# Altium PCB 4Layer.PcbDoc
Units mm, origin at the board's own origin, x right, y up, seen from the top; angles counter-clockwise.
Board outline 152.4 x 101.6 mm, 4 copper layers (Top Layer, Int1 (GND), Int2 (PWR), Bottom Layer), stack 1.57 mm thick; 68 components, 45 nets, 268 pads, 0 vias.
Unrouted connection lines stored in the file: 183.
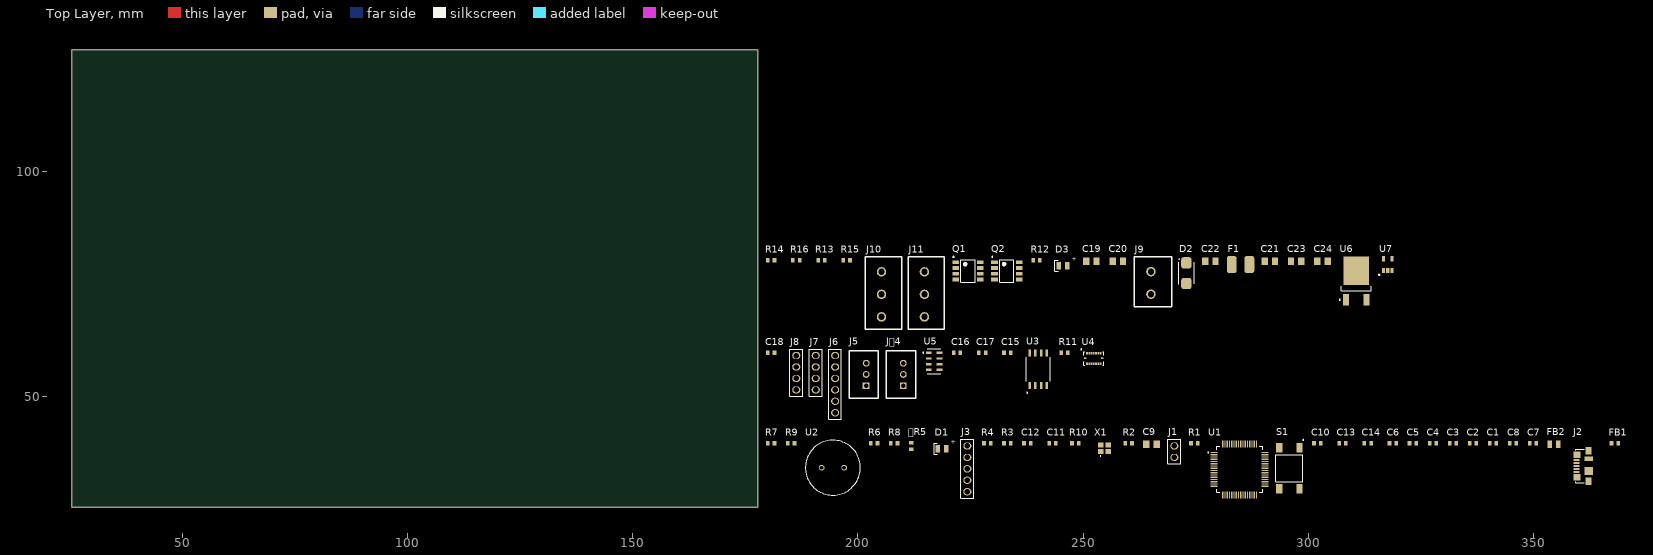
[diagram p0: Top Layer view]
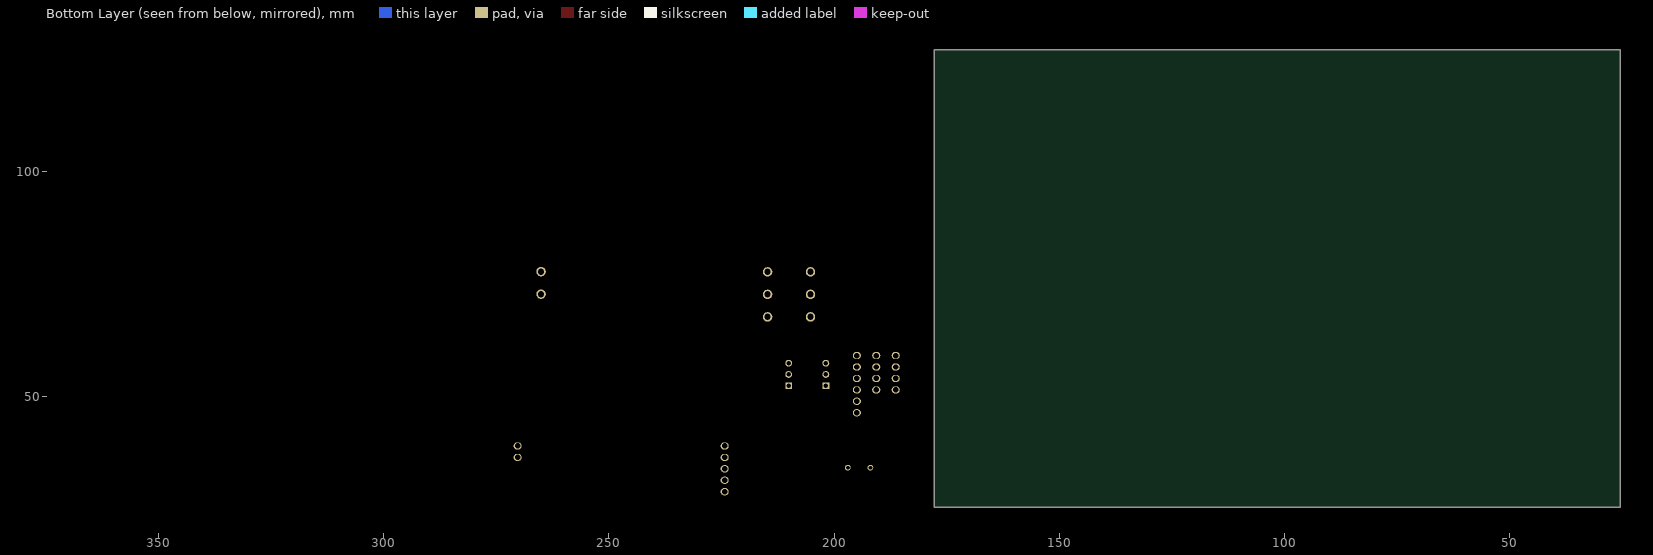
[diagram p1: Bottom Layer view, seen from below]

## Layer stack, top to bottom
Top Solder: solder mask 0.0254, SM-001, Dk 4
Top Layer: signal copper 0.035
Dielectric 1: prepreg 0.2, PP-017, Dk 4.6
Int1 (GND): signal copper 0.0175
Dielectric 3: core 1.065, Core-039, Dk 4.6
Int2 (PWR): signal copper 0.0175
Dielectric 5: prepreg 0.2, PP-017, Dk 4.6
Bottom Layer: signal copper 0.035
Bottom Solder: solder mask 0.0254, SM-001, Dk 4

## Board outline
25.4,25.4 177.8,25.4 177.8,127 25.4,127

## Design rules (kind name [scope] priority, off if disabled: settings)
Clearance [All] p1: gap=0.254 ignorepadtopadclearanceinfootprint=FALSE except(0.1: SMDPad-SMDPad; 0.2: Arc-Arc Arc-Track Arc-SMDPad Arc-Hole Track-Track Track-SMDPad Track-Hole SMDPad-THPad SMDPad-Hole THPad-Hole Via-Hole Fill-Hole Poly-Hole Region-Hole Text-Hole; 0.3: Arc-Via Track-Via Via-Via; 0.33: Arc-THPad Track-THPad; 0.5: THPad-THPad)
DiffPairsRouting [All] p1: maxlimit=0.254 minlimit=0.203 mostfreqgap=0.254 toplayer_maxgap=0.203 toplayer_prefgap=0.203 toplayer_minwidth=0.26 toplayer_maxwidth=0.26 toplayer_prefwidth=0.26 midlayer1_minwidth=0.381 midlayer1_maxwidth=0.381 midlayer1_prefwidth=0.381 midlayer2_minwidth=0.381 midlayer2_maxwidth=0.381 midlayer2_prefwidth=0.381 bottomlayer_maxgap=0.203 bottomlayer_prefgap=0.203 bottomlayer_minwidth=0.26 bottomlayer_maxwidth=0.26 bottomlayer_prefwidth=0.26 maxuncoupledlength=12.7
HoleSize [All] p1: absolutevalues=TRUE maxlimit=6 minlimit=0.3 maxpercent=80.000 minpercent=20.000
HoleToHoleClearance [All] p1: gap=0.5 allowstackedmicrovias=TRUE
MinimumSolderMaskSliver [All] p1: minsoldermaskwidth=0.005
PlaneConnect [All] p1: planeconnectstyle=Direct reliefexpansion=0.508 reliefentries=4 reliefconductorwidth=0.254 reliefairgap=0.254
PolygonConnect [All] p1: connectstyle=Direct reliefconductorwidth=0.254 reliefentries=4 polygonreliefangle="90 Angle" airgapwidth=0.254
RoomDefinition Power [InComponentClass('Power')] p1: confinementstyle=ConfineIn formatcopy=TRUE lockcomponents=FALSE outline 178.943,64.516 319.278,64.516 319.278,83.947 178.943,83.947
RoomDefinition Peripheral [InComponentClass('Peripheral')] p2: confinementstyle=ConfineIn formatcopy=TRUE lockcomponents=FALSE outline 178.943,44.577 255.016,44.577 255.016,63.373 178.943,63.373
RoomDefinition MCU [InComponentClass('MCU')] p3: confinementstyle=ConfineIn formatcopy=TRUE lockcomponents=FALSE outline 178.943,26.797 370.713,26.797 370.713,43.307 178.943,43.307
RoutingVias [All] p1: holewidth=0.3 width=0.7 viastyle="Through Hole" minholewidth=0.3 minwidth=0.5 maxholewidth=0.7 maxwidth=0.9
SilkToSilkClearance [All] p1: silktosilkclearance=0.2
SolderMaskExpansion [All] p1: expansion=0.05 istentingtop=FALSE
UnRoutedNet [All] p1: checkbadconnections=TRUE
Width [All] p1: maxlimit=1 minlimit=0.2 preferedwidth=0.3 minimp=50.000000 maximp=50.000000 favimp=50.000000
23 further rules are at their usual default settings.

## Classes and differential pairs
differential pair class DIFF_USB: USB_D
component class Power: C19 C20 C21 C22 C23 C24 D2 D3 F1 J9 J10 J11 Q1 Q2 R12 R13 R14 R15 R16 U6 U7
component class Peripheral: C15 C16 C17 C18 J5 J6 J7 J8 J4 R11 U3 U4 U5
component class MCU: R5 C1 C2 C3 C4 C5 C6 C7 C8 C9 C10 C11 C12 C13 C14 D1 FB1 FB2 J1 J2 J3 R1 R2 R3 R4 R6 R7 R8 R9 R10 S1 U1 U2 X1
differential pair USB_D: +USB_D_P -USB_D_N

## Components (designator, comment, footprint, x,y, rotation, side; value= is the part's Value field where it differs from the comment)
R5 "1K" "RES 0603" 211.836,38.989 r90 top
C1 "100n" "CAP 0603" 340.995,39.624 r0 top
C2 "100n" "CAP 0603" 336.55,39.624 r0 top
C3 "100n" "CAP 0603" 332.105,39.624 r0 top
C4 "100n" "CAP 0603" 327.66,39.624 r0 top
C5 "1u" "CAP 0603" 323.215,39.624 r0 top
C6 "2u2" "CAP 0603" 318.77,39.624 r0 top
C7 "100n" "CAP 0603" 349.885,39.624 r0 top
C8 "1u" "CAP 0603" 345.44,39.624 r0 top
C9 "4u7" "CAP 0805" 265.176,39.37 r0 top
C10 "100n" "CAP 0603" 302.006,39.624 r0 top
C11 "8p" "CAP 0603" 243.205,39.624 r0 top
C12 "8p" "CAP 0603" 237.617,39.624 r0 top
C13 "2u2" "CAP 0603" 307.594,39.624 r0 top
C14 "2u2" "CAP 0603" 313.182,39.624 r0 top
C15 "100n" "CAP 0603" 233.172,59.69 r0 top
C16 "100n" "CAP 0603" 221.996,59.69 r0 top
C17 "100n" "CAP 0603" 227.584,59.69 r0 top
C18 "100n" "CAP 0603" 180.721,59.69 r0 top
C19 "0u33" "CAP 0805" 251.841,80.01 r0 top
C20 "100n" "CAP 0805" 257.683,80.01 r0 top
C21 "100n" "CAP 0805" 291.465,80.01 r0 top
C22 "470p" "CAP 0805" 278.257,80.01 r0 top
C23 "4u7" "CAP 0805" 297.307,80.01 r0 top
C24 "100n" "CAP 0805" 303.149,80.01 r0 top
D1 "LED 0805 BLUE" "LED 0805 BLUE" 218.694,38.354 r0 top
D2 "SMBJ12CA-13-F" SMBJ12CA-13-F 272.923,77.343 r90 top
D3 "LED 0805 RED" "LED 0805 RED" 245.491,78.994 r0 top
F1 "0ZCG0075FF2C" 0ZCG0075FF2C 284.988,79.375 r0 top
FB1 "600 Ω @ 100 MHz" "FB 0603" 368.046,39.624 r0 top
FB2 "100R" "FB 0805" 354.584,39.37 r0 top
J1 "1x2 HEADER" "1x2 HEADER" 270.256,38.989 r90 top
J2 "47346-0001" MOLEX_47346-0001 362.204,34.544 r90 top
J3 "1x5 HEADER MALE" "1X5 HEADER MALE" 224.282,33.909 r90 top
J5 "JST B3B-XH-A" JST_B3B-XH-A 201.295,54.864 r90 top
J6 "1x6 HEADER MALE" "1X6 HEADER MALE" 194.945,52.705 r90 top
J7 "1x4 HEADER MALE" "1X4 HEADER MALE" 190.627,55.245 r90 top
J8 "1x4 HEADER MALE" "1X4 HEADER MALE" 186.309,55.245 r90 top
J9 "KF301 2P Terminal" "KF301 2P" 265.049,75.184 r90 top
J10 "KF301 3P Terminal" "KF301 3P" 205.232,72.644 r90 top
J11 "KF301 3P Terminal" "KF301 3P" 214.757,72.644 r90 top
J4 "JST B3B-XH-A" JST_B3B-XH-A 209.55,54.864 r90 top
Q1 "DMG4822SSD-13" DMG4822SSD-13 224.409,77.851 r0 top
Q2 "DMG4822SSD-13" DMG4822SSD-13 233.045,77.851 r0 top
R1 "10K" "RES 0603" 274.701,39.624 r0 top
R2 "0R" "RES 0603" 260.096,39.624 r0 top
R3 "1K" "RES 0603" 233.172,39.624 r0 top
R4 "1K" "RES 0603" 228.727,39.624 r0 top
R6 "10K" "RES 0603" 203.581,39.624 r0 top
R7 "10K" "RES 0603" 180.721,39.624 r0 top
R8 "10K" "RES 0603" 208.026,39.624 r0 top
R9 "10K" "RES 0603" 185.166,39.624 r0 top
R10 "10K" "RES 0603" 248.285,39.624 r0 top
R11 "10K" "RES 0603" 245.872,59.69 r0 top
R12 "1K" "RES 0603" 239.649,80.264 r0 top
R13 "1K" "RES 0603" 191.897,80.264 r0 top
R14 "10K" "RES 0603" 180.721,80.264 r0 top
R15 "1K" "RES 0603" 197.485,80.264 r0 top
R16 "10K" "RES 0603" 186.309,80.264 r0 top
S1 "FSM4JSMATR" FSM4JSMATR 295.783,34.036 r0 top
U1 "STM32F446RET6" STM32F446RET6 284.734,33.782 r0 top
U2 "PS1240P02BT" PS1240P02BT 194.437,34.163 r0 top
U3 "W25Q64JVSSIQ" W25Q64JVSSIQ 240.03,56.007 r90 top
U4 "BMI088" BMI088 252.349,58.42 r0 top
U5 "MS560702BA03-50" MS5607-02BA3 216.916,57.785 r0 top
U6 "L78M05CDT-TR" L78M05CDT-TR 310.642,75.565 r90 top
U7 "MIC5205-3.3YM5-TR" MIC5205-3.3YM5-TR 317.627,79.248 r0 top
X1 "FA-20H 16.0000MF10Z-AJ0" "FA-20H 16.0000MF10Z-AJ0" 254.762,38.481 r0 top

## Footprints (in the part's own frame and the unit in brackets; to place one, negate y for a bottom-side part, rotate by r counter-clockwise, add the part's x,y. Pads: shape width x height; smd on the part's side, far side on the other; paste and mask are expansions set on the pad)
0ZCG0075FF2C [mm] "PTC"
  rrect50% 2.2x3.8 smd: 1(-2,-0.125) 2(1.9,-0.125)
  body extent -2.26,-1.75 2.29,1.49, height 0.7
"1x2 HEADER" [mm]
  oval 1.6x1.8 hole 1.2: 1(-2.54,0) 2(0,0)
  silkscreen extent -3.97,-1.4 1.5,1.45
"1X4 HEADER MALE" [mm]
  oval 1.6x1.8 hole 1.2: 1(-3.81,0) 2(-1.27,0) 3(1.27,0) 4(3.81,0)
  silkscreen extent -5.23,-1.4 5.25,1.45, body extent -5.08,-1.27 5.08,1.27, height 9.2
"1X5 HEADER MALE" [mm]
  oval 1.6x1.8 hole 1.2: 1(-5.08,0) 2(-2.54,0) 3(0,0) 4(2.54,0) 5(5.08,0)
  silkscreen extent -6.5,-1.4 6.57,1.45, body extent -6.32,-1.27 6.38,1.27, height 9.2
"1X6 HEADER MALE" [mm]
  oval 1.6x1.8 hole 1.2: 1(-6.35,0) 2(-3.81,0) 3(-1.27,0) 4(1.27,0) 5(3.81,0) 6(6.35,0)
  silkscreen extent -7.77,-1.4 7.8,1.45, body extent -7.62,-1.27 7.62,1.27, height 9.2
BMI088 [mm]
  rect 0.35x0.59 smd: 1(-1.5,1.165) 2(-1,1.165) 3(-0.5,1.165) 4(0,1.165) 5(0.5,1.165) 6(1,1.165) 7(1.5,1.165) 9(1.5,-1.165) 10(1,-1.165) 11(0.5,-1.165) 12(0,-1.165) 13(-0.5,-1.165) 14(-1,-1.165) 15(-1.5,-1.165)
  rect 0.59x0.35 smd: 8(1.915,0) 16(-1.915,0)
  silkscreen extent -2.85,-1.5 2.25,2.1, body extent -2.25,-1.5 2.25,1.5, height 1.55
"CAP 0603" [mm]
  rect 0.8x1 smd: 1(-0.75,0) 2(0.75,0)
  body extent -0.8,-0.4 0.8,0.4, height 0.51
"CAP 0805" [mm]
  rect 1.4x1.7 smd: 1(-1.143,0) 2(1.143,0)
  body extent -1.15,-0.76 1.15,0.79, height 1.01
DMG4822SSD-13 [mm]
  rect 1.45x0.8 smd: 1(-2.725,1.905) 2(-2.725,0.635) 3(-2.725,-0.635) 4(-2.725,-1.905) 5(2.725,-1.905) 6(2.725,-0.635) 7(2.725,0.635) 8(2.725,1.905)
  silkscreen extent -3.32,-2.5 1.6,3.22, body extent -3.1,-2.5 3.1,2.5, height 1.7
"FA-20H 16.0000MF10Z-AJ0" [mm]
  rect 1.2x1.1 smd: 1(-0.85,-0.7) 2(0.85,-0.7) 3(0.85,0.7) 4(-0.85,0.7)
  silkscreen extent -0.95,-1.8 -0.85,-1.7, body extent -1.25,-1 1.25,1, height 0.63
"FB 0603" [mm]
  rect 0.8x1 smd: 1(-0.75,0) 2(0.75,0)
  body extent -0.8,-0.4 0.8,0.4, height 0.81
"FB 0805" [mm]
  rect 1x1.7 smd: 1(-0.95,0) 2(0.95,0)
  body extent -1,-0.63 1,0.63, height 0.86
FSM4JSMATR [mm]
  rect 1.4x2.1 smd: 1(2.25,4.55) 2(2.25,-4.55) 3(-2.25,4.55) 4(-2.25,-4.55)
  silkscreen extent -3,-3 3.18,6.39, body extent -3,-5 3,5, height 5.13
JST_B3B-XH-A [mm]
  rect 1.508x1.508 / inner round 1.508 / far side rect 1.508x1.508 hole 1: 1(-2.5,-0.525)
  round 1.508 hole 1: 2(0,-0.525) 3(2.5,-0.525)
  silkscreen extent -5.25,-3.25 5.25,3.25, body extent -4.95,-2.88 4.95,2.88, height 7
"KF301 2P" [mm] "2 Pin 5mm Terminal"
  round 2.1 hole 1.4: 1(-2.5,0) 2(2.5,0)
  silkscreen extent -5.33,-4.57 5.84,3.68, body extent -5,-4.13 5.5,3.37, height 10
"KF301 3P" [mm] "3 Pin 5mm Terminal"
  round 2.1 hole 1.4: 1(-5,0) 2(0,0) 3(5,0)
  silkscreen extent -7.75,-4.45 8.38,3.56, body extent -7.45,-4.19 7.95,3.31, height 10.01
L78M05CDT-TR [mm]
  rect 2.6x1.3 smd: 1(-4.15,2.28) 3(-4.15,-2.28)
  rect 6.3x5.7 smd: 2(2.35,0)
  silkscreen extent -4.22,-3.3 -1.15,3.82, body extent -4.89,-3.25 5.04,3.29, height 2.34
"LED 0805 BLUE" [mm]
  rect 1x1.7 smd: A(0.95,0) K(-0.95,0)
  silkscreen extent -1.8,-1.2 -1.05,1.2, body extent -1,-0.63 1,0.63, height 1.12
"LED 0805 RED" [mm]
  rect 1x1.7 smd: A(0.95,0) K(-0.95,0)
  silkscreen extent -1.8,-1.2 -1.05,1.2, body extent -1,-0.63 1,0.63, height 1.12
MIC5205-3.3YM5-TR [mm]
  rect 0.69x1.2 smd: 1(-0.95,-1.3) 2(0,-1.3) 3(0.95,-1.3) 4(0.95,1.3) 5(-0.95,1.3)
  silkscreen extent -2,-2.39 -1.81,-2.19, body extent -1.45,-1.4 1.45,1.4, height 1.45
MOLEX_47346-0001 [mm]
  rect 0.45x1.38 smd: 1(-1.3,2.66) 2(-0.65,2.66) 3(0,2.66) 4(0.65,2.66) 5(1.3,2.66)
  rect 1.425x1.55 smd: S1(-2.488,2.575) S2(2.488,2.575)
  rect 1.65x1.3 smd: S3(-3.375,0) S6(3.375,0)
  rect 1.8x1.9 smd: S4(-1.15,0)
  rect 1x1.9 smd: S5(1.55,0)
  silkscreen extent -3.75,1 3.75,2.85, body extent -4.18,-2.93 4.18,2.5, height 2.7
MS5607-02BA3 [mm]
  rrect15% 1.31x0.53 smd: 1(-1.2,1.875)
  rrect16% 1.31x0.53 smd: 2(-1.2,0.625) 3(-1.2,-0.625) 4(-1.2,-1.875) 5(1.2,-1.875) 6(1.2,-0.625) 7(1.2,0.625) 8(1.2,1.875)
  silkscreen extent -2.5,-2.78 1.5,2.78, body extent -1.5,-2.5 1.5,2.5, height 1.1
PS1240P02BT [mm] "Buzzer"
  round 1.28 hole 0.85: 1(-2.5,0) 2(2.5,0)
  silkscreen extent -6.1,-6.1 6.1,6.1, body extent -6.1,-6.1 6.1,6.1, height 6.51
"RES 0603" [mm]
  rect 0.8x1 smd: 1(-0.75,0) 2(0.75,0)
  body extent -0.8,-0.43 0.8,0.43, height 0.52
SMBJ12CA-13-F [mm]
  rrect50% 2.5x2.3 smd: 1(2.3,0) 2(-2.3,0)
  silkscreen extent -2.5,-1.7 3.15,1.7, body extent -2.65,-1.81 2.65,1.81, height 2.5
STM32F446RET6 [mm]
  rrect50% 1.56x0.28 smd: 1(-5.68,3.75) 2(-5.68,3.25) 3(-5.68,2.75) 4(-5.68,2.25) 5(-5.68,1.75) 6(-5.68,1.25) 7(-5.68,0.75) 8(-5.68,0.25) 9(-5.68,-0.25) 10(-5.68,-0.75) 11(-5.68,-1.25) 12(-5.68,-1.75) 13(-5.68,-2.25) 14(-5.68,-2.75) 15(-5.68,-3.25) 16(-5.68,-3.75) 33(5.68,-3.75) 34(5.68,-3.25) 35(5.68,-2.75) 36(5.68,-2.25) 37(5.68,-1.75) 38(5.68,-1.25) 39(5.68,-0.75) 40(5.68,-0.25) 41(5.68,0.25) 42(5.68,0.75) 43(5.68,1.25) 44(5.68,1.75) 45(5.68,2.25) 46(5.68,2.75) 47(5.68,3.25) 48(5.68,3.75)
  rrect50% 0.28x1.56 smd: 17(-3.75,-5.68) 18(-3.25,-5.68) 19(-2.75,-5.68) 20(-2.25,-5.68) 21(-1.75,-5.68) 22(-1.25,-5.68) 23(-0.75,-5.68) 24(-0.25,-5.68) 25(0.25,-5.68) 26(0.75,-5.68) 27(1.25,-5.68) 28(1.75,-5.68) 29(2.25,-5.68) 30(2.75,-5.68) 31(3.25,-5.68) 32(3.75,-5.68) 49(3.75,5.68) 50(3.25,5.68) 51(2.75,5.68) 52(2.25,5.68) 53(1.75,5.68) 54(1.25,5.68) 55(0.75,5.68) 56(0.25,5.68) 57(-0.25,5.68) 58(-0.75,5.68) 59(-1.25,5.68) 60(-1.75,5.68) 61(-2.25,5.68) 62(-2.75,5.68) 63(-3.25,5.68) 64(-3.75,5.68)
  silkscreen extent -7.1,-5.1 5.1,5.1, body extent -6,-6 6,6, height 1.6
W25Q64JVSSIQ [mm] "SPI Flash Memory"
  rrect25% 1.61x0.58 smd: 1(-3.605,1.905) 2(-3.605,0.635) 3(-3.605,-0.635) 4(-3.605,-1.905) 5(3.605,-1.905) 6(3.605,-0.635) 7(3.605,0.635) 8(3.605,1.905)
  silkscreen extent -5.31,-2.69 2.69,2.69, body extent -3.95,-2.64 3.95,2.64, height 2.16

## Part data
R5 R1 R2 R3 R4 R6 R7 R8 R9 R10 R11 R12 R13 R14 R15 R16: library part "RES 0603", "Resistor SMD 0603"
C1 C2 C3 C4 C6 C7 C8 C10 C11 C12 C13 C14 C15 C16 C17 C18: library part "CAP 0603 50V", "Capacitor SMD 0603 50V"
C5: library part "CAP 0603 16V", "Capacitor SMD 0603 16V"
C9: library part "CAP 0805 25V", "Capacitor SMD 0805 25V"
C19 C20 C21 C22 C23 C24: library part "CAP 0805 50V", "Capacitor SMD 0805 50V"
D1: "LED 0805 GREEN SMD"
D2: "TVS DIODE 12VWM 19.9VC SMB", Breakdown Voltage=15.3V, Capacitance=340pF, Case/Package=SMB, Clamping Voltage=19.9V, Leakage Current=5uA, Manufacturer=Diodes, Max Operating Temperature=150°C, Max Output Current=30.2A, Max Power Dissipation=600W, Min Breakdown Voltage=13.3V, Min Operating Temperature=-55°C, Package Body Material=Plastic, Package Quantity=3000, Package Shape=Rectangular, Peak Reflow Temperature (Cel)=245°C, Power Line Protection=No, Reverse Standoff Voltage=12V, Test Current=1mA, Time @ Peak Reflow Temperature-Max (s)=5s, Category="TVS Diodes", Clamping Voltage-Max=19.9V, ComponentLink1Description=https://datasheet.ciiva.com/34302/1542303-34302437.pdf?src-supplier=Jameco, ComponentLink1URL=https://datasheet.ciiva.com/34302/1542303-34302437.pdf?src-supplier=Jameco, Diode Element Material=SILICON, Diode Type=ZENER, Direction=Bidirectional, Height=2.62mm, JESD-30 Code=R-PDSO-C2, Lead Free="Contains Lead", Length=4.57mm, Manufacturer Part Number=SMBJ12CA-13-F, Max Breakdown Voltage=15.3V, Max Reverse Leakage Current=5uA, Max Surge Current=30.2A, Moisture Sensitivity Level=1, Mount="Surface Mount", Number of Bidirectional Channels=1, Number of Elements=1, Number of Pins=2, Packaging="Tape and Reel", Peak Pulse Current=30.2A, Peak Pulse Power=600W, Polarity=Bidirectional, Power Dissipation=600W, Pricing 1="3000=0,104, 9000=0,0995, 12000=0,0985, 30000=0,0953, 45000=0,0922 (USD)", Radiation Hardening=No, Reverse Breakdown Voltage=13.3V, RoHS=Yes, RoHS Compliant=Yes, Series=SMBJ, Stock 1=27000, Supplier 1="Future Electronics", Surface Mount=Yes, Technology=AVALANCHE, Terminal Finish=Tin, Terminal Form="C BEND", Terminal Position=DUAL, Termination=SMD/SMT, Voltage Rating (DC)=12V, Width=3.9mm, Working Voltage=12V
D3: "LED 0805 RED SMD"
F1: "PTC Resettable Fuse 0.75A(hold) 1.5A(trip) 16VDC 100A 0.8W 0.2s 0.11Ohm SMD Solder Pad 1812 4.73 X 3.41 X 0.65mm T/R...", Case Code (Metric)=4532, Case Code (Imperial)=1812, Hold Current=750mA, Manufacturer=Bel, Max Current Rating=100A, Max Operating Temperature=85°C, Min Operating Temperature=-40°C, Trip Current=1.5A, Case/Package=1812, Category="PTC Resettable Fuses", ComponentLink1Description=https://datasheet.ciiva.com/18550/0zcg-18550523.pdf?src-supplier=Digi-Key, ComponentLink1URL=https://datasheet.ciiva.com/18550/0zcg-18550523.pdf?src-supplier=Digi-Key, ComponentLink2Description=https://datasheet.ciiva.com/18550/0zcg-18550524.pdf?src-supplier=Digi-Key, ComponentLink2URL=https://datasheet.ciiva.com/18550/0zcg-18550524.pdf?src-supplier=Digi-Key, ComponentLink3Description=https://datasheet.ciiva.com/18550/0zcg-18550767.pdf?src-supplier=Digi-Key, ComponentLink3URL=https://datasheet.ciiva.com/18550/0zcg-18550767.pdf?src-supplier=Digi-Key, Contact Plating=Tin,Matte, Lead Free="Lead Free", Manufacturer Part Number=0ZCG0075FF2C, Mount="Surface Mount", Packaging="Cut Tape", Pricing 1="2000=0,0751, 4000=0,0699, 6000=0,065, 10000=0,0604 (USD)", RoHS=Yes, RoHS Compliant=Yes, Series=0ZCG, Stock 1=4661, Supplier 1="Arrow Electronics", Time to Trip=200ms
FB1: library part "FB 0603", "Ferrite Bead SMD 0603"
FB2: library part "FB 0805", "Ferrite Bead SMD 0805"
J2: "Micro-USB B Receptacle with Flange, Bottom Mount, Surface Mount, Lead-Free", Color=Black, Contact Current Rating=1A, Contact Resistance=40mR, Current Rating=1.8A, Flammability Rating="UL94 V-0", Manufacturer=Molex, Max Operating Temperature=85°C, Max Voltage Rating (AC)=30V, Min Operating Temperature=-20°C, Category="Headers and Wire Housings", ComponentLink1Description=https://datasheet.ciiva.com/30075/304740473460001-io-nectors-30075527.pdf?src-supplier=Onlinecomponents.com, ComponentLink1URL=https://datasheet.ciiva.com/30075/304740473460001-io-nectors-30075527.pdf?src-supplier=Onlinecomponents.com, ComponentLink2Description=https://datasheet.ciiva.com/22654/1630785-22654942.pdf?src-supplier=Element14, ComponentLink2URL=https://datasheet.ciiva.com/22654/1630785-22654942.pdf?src-supplier=Element14, ComponentLink3Description=https://datasheet.ciiva.com/16148/1700180473460001-io-nectors-16148917.pdf?src-supplier=Onlinecomponents.com, ComponentLink3URL=https://datasheet.ciiva.com/16148/1700180473460001-io-nectors-16148917.pdf?src-supplier=Onlinecomponents.com, ComponentLink4Description=https://datasheet.ciiva.com/16986/70266948-16986683.pdf?src-supplier=Allied+Electronics, ComponentLink4URL=https://datasheet.ciiva.com/16986/70266948-16986683.pdf?src-supplier=Allied+Electronics, ComponentLink5Description=https://datasheet.ciiva.com/28504/0473460001-io-connectors-28504587.pdf?src-supplier=Element14, ComponentLink5URL=https://datasheet.ciiva.com/28504/0473460001-io-connectors-28504587.pdf?src-supplier=Element14, ComponentLink6Description=https://datasheet.ciiva.com/46390/1681853-46390956.pdf?src-supplier=Element14, ComponentLink6URL=https://datasheet.ciiva.com/46390/1681853-46390956.pdf?src-supplier=Element14, Connector Type=USB,Receptacle, Contact Material="Copper Alloy,Copper", Contact Plating=Gold, Gender=Female, Glow Wire Compliant=Non-compliant, Halogen Free="Low Halogen", Housing Material=Polymer, Lead Free="Lead Free", Manufacturer Part Number=47346-0001, Mount="Surface Mount", Number of Circuits=5, Number of Contacts=5, Number of Ports=1, Number of Positions=5, Number of Rows=1, Orientation="Right Angle", Packaging="Tape and Reel", Pitch=0.65mm, Pricing 1="14000=0,5225 (USD)", Reach SVHC Compliant=Unknown, RoHS=Yes, RoHS Compliant=Yes, Series=47346, Stock 1=14156, Supplier 1="Sager Electronics", Termination=SMD/SMT, USB Standard="USB 2.0", Voltage Rating=30V, Voltage Rating (AC)=30V
J5 J4: "Connector Header, XH Series, 3 Position, 2.50mm, Through Hole, Press-Fit, Solder, Natural", Manufacturer=JST, Manufacturer Part Number=B3B-XH-A(LF)(SN), Category="Headers and Wire Housings", ComponentLink1Description=https://datasheet.ciiva.com/26894/getdatasheetpartid-640434-26894454.pdf?src-supplier=Verical, ComponentLink1URL=https://datasheet.ciiva.com/26894/getdatasheetpartid-640434-26894454.pdf?src-supplier=Verical, ComponentLink2Description=https://datasheet.ciiva.com/26894/getdatasheetpartid-440399-26894778.pdf?src-supplier=Verical, ComponentLink2URL=https://datasheet.ciiva.com/26894/getdatasheetpartid-440399-26894778.pdf?src-supplier=Verical, ComponentLink3Description=https://datasheet.ciiva.com/11746/0900766b8082653f-11746520.pdf?src-supplier=Rs, ComponentLink3URL=https://datasheet.ciiva.com/11746/0900766b8082653f-11746520.pdf?src-supplier=Rs, Pricing 1="1=39,94, 10=25,1, 50=21,68, 100=18,25, 500=17,57, 1000=17,12, 2000=16,44, 4000=15,79 (JPY)", RoHS=Yes, Stock 1=2101, Supplier 1=CoreStaff
J9: "2 Pin Screw Terminal Block 5mm"
J10 J11: "3 Pin Screw Terminal Block 5mm"
Q1 Q2: "Dual N-Channel 30 V 1.42 W 10.5 nC Enhancement Mode Mosfet - SOIC-8", Case/Package=SOIC, Continuous Drain Current (ID)=10A, Drain to Source Resistance=20mR, Drain to Source Voltage (Vdss)=30V, Gate to Source Voltage (Vgs)=25V, Manufacturer=Diodes, Max Operating Temperature=150°C, Max Power Dissipation=1.42W, Min Operating Temperature=-55°C, Package Quantity=2500, Input Capacitance=478.9pF, Category=MOSFETs, ComponentLink1Description=https://datasheet.ciiva.com/4443/dmg4822ssd-10758-4443079.pdf?src-supplier=Mouser, ComponentLink1URL=https://datasheet.ciiva.com/4443/dmg4822ssd-10758-4443079.pdf?src-supplier=Mouser, ComponentLink2Description=https://datasheet.ciiva.com/6386/dmg4822ssd-6386688.pdf?src-supplier=Digi-Key, ComponentLink2URL=https://datasheet.ciiva.com/6386/dmg4822ssd-6386688.pdf?src-supplier=Digi-Key, ComponentLink3Description=https://datasheet.ciiva.com/11174/dmg4822ssd-11174891.pdf?src-supplier=Avnet, ComponentLink3URL=https://datasheet.ciiva.com/11174/dmg4822ssd-11174891.pdf?src-supplier=Avnet, Fall Time=3.1ns, FET Type="2 N-Channel", Height=1.5mm, Lead Free="Lead Free", Length=4.95mm, Manufacturer Part Number=DMG4822SSD-13, Mount="Surface Mount", Number of Channels=2, Number of Pins=8, Packaging="Tape and Reel", Polarity=N-CHANNEL, Pricing 1="1=0,5556, 10=0,4998, 25=0,4948, 100=0,3987, 250=0,3947, 500=0,3232, 1000=0,265 (USD)", Radiation Hardening=No, Rds On Max=20mR, Reach SVHC Compliant=Yes, Rise Time=7.9ns, RoHS=Yes, RoHS Compliant=Yes, Series=-, Stock 1=2374, Supplier 1="Arrow Electronics", Turn-Off Delay Time=14.6ns, Turn-On Delay Time=2.9ns, Weight=0.00261oz, Width=3.95mm
S1: "Switch Tactile OFF (ON) SPST Round Button Gull Wing 0.05A 24VDC 1.57N SMD T/R", Manufacturer="TE Connectivity Alcoswitch", Category="Pushbutton Switches", ComponentLink1Description=https://datasheet.ciiva.com/16320/eng-cs-1308111-1-switches-core-program-catalog-0308-16320065.pdf?src-supplier=Future+Electronics, ComponentLink1URL=https://datasheet.ciiva.com/16320/eng-cs-1308111-1-switches-core-program-catalog-0308-16320065.pdf?src-supplier=Future+Electronics, ComponentLink2Description=https://datasheet.ciiva.com/1530/1683375-1530944.pdf?src-supplier=Element14, ComponentLink2URL=https://datasheet.ciiva.com/1530/1683375-1530944.pdf?src-supplier=Element14, ComponentLink3Description=https://datasheet.ciiva.com/23765/1486934-23765878.pdf?src-supplier=Newark, ComponentLink3URL=https://datasheet.ciiva.com/23765/1486934-23765878.pdf?src-supplier=Newark, ComponentLink4Description=https://datasheet.ciiva.com/7638/921681-7638037.pdf?src-supplier=Element14, ComponentLink4URL=https://datasheet.ciiva.com/7638/921681-7638037.pdf?src-supplier=Element14, Manufacturer Part Number=FSM4JSMATR, Pricing 1="1=0,36, 10=0,351, 25=0,33, 100=0,2866, 250=0,26, 500=0,24188 (USD)", RoHS=Yes, Stock 1=84996, Supplier 1=Digi-Key
U1: "ARM® Cortex®-M4 STM32 F4 Microcontroller IC 32-Bit 180MHz 512KB (512K x 8) FLASH 64-LQFP (10x10)", Manufacturer=STMicroelectronics, Category=Microcontrollers, ComponentLink1Description=http://www.mouser.com/ds/2/389/stm32f446mc-956216.pdf?src-supplier=Mouser, ComponentLink1URL=http://www.mouser.com/ds/2/389/stm32f446mc-956216.pdf?src-supplier=Mouser, ComponentLink2Description=http://www.farnell.com/datasheets/2309063.pdf?src-supplier=Farnell, ComponentLink2URL=http://www.farnell.com/datasheets/2309063.pdf?src-supplier=Farnell, ComponentLink3Description=https://datasheet.octopart.com/STM32F446RET6-STMicroelectronics-datasheet-58295083.pdf?src-supplier=Future+Electronics, ComponentLink3URL=https://datasheet.octopart.com/STM32F446RET6-STMicroelectronics-datasheet-58295083.pdf?src-supplier=Future+Electronics, ComponentLink4Description=http://www.st.com/content/ccc/resource/technical/document/datasheet/65/cb/75/50/53/d6/48/24/DM00141306.pdf/files/DM00141306.pdf/jcr:content/translations/en.DM00141306.pdf?src-supplier=Digi-Key, ComponentLink4URL=http://www.st.com/content/ccc/resource/technical/document/datasheet/65/cb/75/50/53/d6/48/24/DM00141306.pdf/files/DM00141306.pdf/jcr:content/translations/en.DM00141306.pdf?src-supplier=Digi-Key, ComponentLink5Description=http://www.farnell.com/datasheets/2309063.pdf?src-supplier=Element14, ComponentLink5URL=http://www.farnell.com/datasheets/2309063.pdf?src-supplier=Element14, ComponentLink6Description=https://datasheet.octopart.com/STM32F446RET6-STMicroelectronics-datasheet-41797127.pdf?src-supplier=Element14, ComponentLink6URL=https://datasheet.octopart.com/STM32F446RET6-STMicroelectronics-datasheet-41797127.pdf?src-supplier=Element14, ComponentLink7Description=http://www.farnell.com/datasheets/2309063.pdf?src-supplier=Newark, ComponentLink7URL=http://www.farnell.com/datasheets/2309063.pdf?src-supplier=Newark, ComponentLink8Description=https://datasheet.octopart.com/STM32F446RET6-STMicroelectronics-datasheet-83961502.pdf?src-supplier=SHENGYU+ELECTRONICS, ComponentLink8URL=https://datasheet.octopart.com/STM32F446RET6-STMicroelectronics-datasheet-83961502.pdf?src-supplier=SHENGYU+ELECTRONICS, Manufacturer Part Number=STM32F446RET6, Pricing 1="1=12,45, 10=11,25, 50=10,54, 100=9,5, 1000=6,72, 10000=6,72 (USD)", RoHS=Yes, Stock 1=2954, Supplier 1=Mouser
U2: "Audio Buzzer Piezo 30Vo-p 3Vo-p 70dBA Through Hole Pin Ammo", Manufacturer=TDK, Category="Audio Products", ComponentLink1Description=https://datasheet.ciiva.com/0/ef532-ps-112.pdf?src-supplier=Digi-Key, ComponentLink1URL=https://datasheet.ciiva.com/0/ef532-ps-112.pdf?src-supplier=Digi-Key, ComponentLink2Description=https://datasheet.ciiva.com/0/ef532-ps-111.pdf?src-supplier=Digi-Key, ComponentLink2URL=https://datasheet.ciiva.com/0/ef532-ps-111.pdf?src-supplier=Digi-Key, ComponentLink3Description=https://datasheet.ciiva.com/3306/ef532-ps-3306958.pdf?src-supplier=Avnet, ComponentLink3URL=https://datasheet.ciiva.com/3306/ef532-ps-3306958.pdf?src-supplier=Avnet, ComponentLink4Description=https://datasheet.ciiva.com/16225/ef532-ps-16225062.pdf?src-supplier=Onlinecomponents.com, ComponentLink4URL=https://datasheet.ciiva.com/16225/ef532-ps-16225062.pdf?src-supplier=Onlinecomponents.com, Manufacturer Part Number=PS1240P02BT, Pricing 1="1=156, 10=90, 50=60, 100=45, 500=39, 1000=34,5, 2000=30, 4000=29,1 (JPY)", RoHS=Yes, Stock 1=34, Supplier 1=CoreStaff
U3: "IC FLASH 64MBIT 104MHZ 8SOIC", Case/Package=SOIC, Frequency=133MHz, Manufacturer=Winbond, Max Operating Temperature=85°C, Min Operating Temperature=-40°C, Category=Flash, ComponentLink1Description=http://www.winbond.com/resource-files/w25q64jv%20revj%2003272018%20plus.pdf?src-supplier=Digi-Key, ComponentLink1URL=http://www.winbond.com/resource-files/w25q64jv%20revj%2003272018%20plus.pdf?src-supplier=Digi-Key, Manufacturer Part Number=W25Q64JVSSIQ, Memory Size=64Mb, Memory Type=Non-Volatile,FLASH, Mount="Surface Mount", Number of Pins=8, Packaging=Rail/Tube, Pricing 1="1=1,03, 25=0,9212, 100=0,8173, 500=0,7987, 5000=0,72112 (USD)", RoHS=Yes, RoHS Compliant=Yes, Series=SpiFlash®, Stock 1=138661, Supplier 1=Digi-Key
U4: "BMI088 Series 3.6 V 6 Axis Digital Output Accelerometer Motion Sensor - LGA-16", Manufacturer="Bosch Tools", Category="Inertial Measurement Units (IMUs)", ComponentLink1Description=https://ae-bst.resource.bosch.com/media/_tech/media/product_flyer/Bosch_Sensortec_Product_flyer_BMI088.pdf?src-supplier=Digi-Key, ComponentLink1URL=https://ae-bst.resource.bosch.com/media/_tech/media/product_flyer/Bosch_Sensortec_Product_flyer_BMI088.pdf?src-supplier=Digi-Key, ComponentLink2Description=https://ae-bst.resource.bosch.com/media/_tech/media/application_notes/BST-MIS-HS001.pdf?src-supplier=Digi-Key, ComponentLink2URL=https://ae-bst.resource.bosch.com/media/_tech/media/application_notes/BST-MIS-HS001.pdf?src-supplier=Digi-Key, Manufacturer Part Number=BMI088, Pricing 1="1=3,4884, 10=3,3155, 25=3,2816, 50=3,2477, 100=3,2147, 500=3,1828 (USD)", RoHS=No, Stock 1=2228, Supplier 1="Arrow Electronics"
U5: "Board Mount Pressure Sensor 0.01bar to 1.2bar Absolute 8-Pin QFN T/R", Case/Package=QFN, Manufacturer="Measurement Specialties", Max Operating Temperature=85°C, Max Supply Voltage=3.6V, Min Operating Temperature=-40°C, Min Supply Voltage=1.8V, Supply Current=12.5uA, Category="Pressure Sensors", ComponentLink1Description=https://datasheet.ciiva.com/28418/1756127-28418369.pdf?src-supplier=Element14, ComponentLink1URL=https://datasheet.ciiva.com/28418/1756127-28418369.pdf?src-supplier=Element14, ComponentLink2Description=https://datasheet.ciiva.com/45422/ms5607-02ba03-45422949.pdf?src-supplier=Digi-Key, ComponentLink2URL=https://datasheet.ciiva.com/45422/ms5607-02ba03-45422949.pdf?src-supplier=Digi-Key, ComponentLink3Description=https://datasheet.ciiva.com/45422/ms5607-02ba03-45422950.pdf?src-supplier=Digi-Key, ComponentLink3URL=https://datasheet.ciiva.com/45422/ms5607-02ba03-45422950.pdf?src-supplier=Digi-Key, ComponentLink4Description=https://datasheet.ciiva.com/45422/ms5607-02ba03-45422951.pdf?src-supplier=Digi-Key, ComponentLink4URL=https://datasheet.ciiva.com/45422/ms5607-02ba03-45422951.pdf?src-supplier=Digi-Key, Manufacturer Part Number=MS560702BA03-50, Number of Pins=8, Pressure Type=Barometric, Reach SVHC Compliant=No, RoHS=Yes, RoHS Compliant=Yes, Stock 1=4561, Supplier 1="Utmel Electronic"
U6: "IC REG LDO 5V 0.5A DPAK", Case/Package=TO-252, Dropout Voltage=2V, Manufacturer=STMicroelectronics, Max Operating Temperature=150°C, Max Output Current=500mA, Max Output Voltage=5V, Max Input Voltage=35V, Min Operating Temperature=0°C, Min Input Voltage=7V, Package Quantity=2500, Power Supply Rejection Ratio (PSRR)=62dB, Quiescent Current=6mA, Tolerance=5%, Category="Voltage Regulators - Linear", ComponentLink1Description=https://datasheet.ciiva.com/34303/2021024-34303902.pdf?src-supplier=Jameco, ComponentLink1URL=https://datasheet.ciiva.com/34303/2021024-34303902.pdf?src-supplier=Jameco, ComponentLink2Description=https://datasheet.ciiva.com/4882/cd00000447-93067-4882369.pdf?src-supplier=Mouser, ComponentLink2URL=https://datasheet.ciiva.com/4882/cd00000447-93067-4882369.pdf?src-supplier=Mouser, ComponentLink3Description=https://datasheet.ciiva.com/15111/getdatasheetpartid-111001-15111751.pdf?src-supplier=Verical, ComponentLink3URL=https://datasheet.ciiva.com/15111/getdatasheetpartid-111001-15111751.pdf?src-supplier=Verical, ComponentLink4Description=https://datasheet.ciiva.com/1512/1834365-1512349.pdf?src-supplier=Element14, ComponentLink4URL=https://datasheet.ciiva.com/1512/1834365-1512349.pdf?src-supplier=Element14, ComponentLink5Description=https://datasheet.ciiva.com/14111/tbl78mxxc-data-e-14111354.pdf?src-supplier=Distrelec, ComponentLink5URL=https://datasheet.ciiva.com/14111/tbl78mxxc-data-e-14111354.pdf?src-supplier=Distrelec, ComponentLink6Description=https://datasheet.ciiva.com/46425/1834365-46425535.pdf?src-supplier=Element14, ComponentLink6URL=https://datasheet.ciiva.com/46425/1834365-46425535.pdf?src-supplier=Element14, ComponentLink7Description=https://datasheet.ciiva.com/2041/cd00000447-2041991.pdf?src-supplier=Digi-Key, ComponentLink7URL=https://datasheet.ciiva.com/2041/cd00000447-2041991.pdf?src-supplier=Digi-Key, ComponentLink8Description=https://datasheet.ciiva.com/2041/cd00000447-2041990.pdf?src-supplier=Digi-Key, ComponentLink8URL=https://datasheet.ciiva.com/2041/cd00000447-2041990.pdf?src-supplier=Digi-Key, ComponentLink9Description=https://datasheet.ciiva.com/2041/cd00000447-2041992.pdf?src-supplier=Digi-Key, ComponentLink9URL=https://datasheet.ciiva.com/2041/cd00000447-2041992.pdf?src-supplier=Digi-Key, ComponentLink10Description=https://datasheet.ciiva.com/16443/cd00000447-16443381.pdf?src-supplier=Future+Electronics, ComponentLink10URL=https://datasheet.ciiva.com/16443/cd00000447-16443381.pdf?src-supplier=Future+Electronics, ComponentLink11Description=https://datasheet.ciiva.com/41439/001184659-da-01-en-ic-reg-ldo-5v-l78m05cdt-tr-to-252-3-stm-41439772.pdf?src-supplier=Conrad, ComponentLink11URL=https://datasheet.ciiva.com/41439/001184659-da-01-en-ic-reg-ldo-5v-l78m05cdt-tr-to-252-3-stm-41439772.pdf?src-supplier=Conrad, Height=2.4mm, Lead Free="Lead Free", Length=6.6mm, Manufacturer Part Number=L78M05CDT-TR, Min Output Voltage=5V, Mount="Surface Mount", Nominal Output Voltage=5V, Number of Outputs=1, Number of Pins=3, Number of Regulators=1, Output Configuration=Positive, Output Current=500mA, Output Type=Fixed, Output Voltage=5V, Packaging="Tape and Reel", Polarity=Positive, Pricing 1="1=0,72, 10=0,629, 50=0,629, 100=0,482, 1000=0,305, 10000=0,277 (USD)", Radiation Hardening=No, Reach SVHC Compliant=No, RoHS=Yes, RoHS Compliant=Yes, Series=-, Stock 1=74380, Supplier 1=Mouser, Width=6.2mm
U7: "Linear Voltage Regulator IC Positive Fixed 1 Output 3.3V 150mA SOT-23-5", Case/Package=SOT-23, Dropout Voltage=165mV, Manufacturer=Microchip, Max Operating Temperature=125°C, Max Output Current=150mA, Max Output Voltage=3.3V, Max Supply Voltage=16V, Min Operating Temperature=-40°C, Min Supply Voltage=2.5V, Output Voltage Accuracy=1%, Power Supply Rejection Ratio (PSRR)=75dB, Accuracy=1%, Category="Voltage Regulators - Linear", Height=1.1mm, Lead Free="Lead Free", Length=2.9mm, Manufacturer Part Number=MIC5205-3.3YM5-TR, Max Input Voltage=16V, Min Input Voltage=2.5V, Mount="Surface Mount", Nominal Output Voltage=3.3V, Number of Outputs=1, Number of Pins=5, Number of Regulators=1, Output Current=150mA, Output Type=Fixed, Output Voltage=3.3V, Packaging="Tape and Reel", Polarity=Positive, Pricing 1="1=0,5386, 10=0,5334, 25=0,4417, 50=0,4373, 100=0,395, 250=0,3909, 500=0,3869, 1000=0,3827, 3000=0,3677 (USD)", Radiation Hardening=No, Reach SVHC Compliant=No, RoHS=Yes, RoHS Compliant=Yes, Series=-, Stock 1=2538, Supplier 1="Arrow Electronics", Termination=SMD/SMT, Width=1.6mm
X1: "Crystal 16MHz ±10ppm (Tol) ±10ppm (Stability) 8pF FUND 80Ohm 4-Pin Ultra Mini-CSMD T/R", Manufacturer=Epson, Category=Crystals, ComponentLink1Description=https://support.epson.biz/td/api/doc_check.php?dl=brief_FA-20H&amp;lang=en&src-supplier=Digi-Key, ComponentLink1URL=https://support.epson.biz/td/api/doc_check.php?dl=brief_FA-20H&amp;lang=en&src-supplier=Digi-Key, ComponentLink2Description=https://www5.epsondevice.com/en/information/support/pdf/june_2018_psc_masterbook.pdf?src-supplier=Digi-Key, ComponentLink2URL=https://www5.epsondevice.com/en/information/support/pdf/june_2018_psc_masterbook.pdf?src-supplier=Digi-Key, ComponentLink3Description=https://www.eea.epson.com/wp-content/uploads/2016/11/November-2016-PCS-MASTER-BOOK.pdf?src-supplier=Digi-Key, ComponentLink3URL=https://www.eea.epson.com/wp-content/uploads/2016/11/November-2016-PCS-MASTER-BOOK.pdf?src-supplier=Digi-Key, Manufacturer Part Number="FA-20H 16.0000MF10Z-AJ0", Pricing 1="1=0,73, 10=0,606, 50=0,5454, 100=0,4848, 500=0,46056 (USD)", RoHS=Yes, Stock 1=229665, Supplier 1=Digi-Key

## Nets (pads, with @x,y where several pads share a name; then routed paths per layer and width w, separated by ;. In a path a pad name is that pad's centre, name@x,y a point inside that pad or via, vN(x,y) a via of type N, cw(c..) or ccw(c..) an arc to the next point about the centre after c; other vN are vias at no path point)
3V3: C1.2 C2.2 C3.2 C4.2 C5.2 C6.2 C15.1 C16.2 C17.2 C18.2 C23.2 C24.2 D3.A FB1.1 J1.1 J3.4 J6.6 J7.4 J8.4 R6.2 R7.2 R8.2 R9.2 R10.2 R11.2 U1.1 U1.19 U1.32 U1.48 U1.64 U3.3 U3.7 U3.8 U4.3 U4.7 U4.11 U4.14 U5.1 U5.2 U5.4 U5.5 U7.5
5V: C13.1 C20.2 C21.2 FB2.1 U6.3 U7.1 U7.3
Beeper: U1.34 U2.2
BOOT0: R1.2 U1.60
DP1-R: R3.2 U1.10
DP2-R: R4.1 U1.36
GND: R5.2 C1.1 C2.1 C3.1 C4.1 C5.1 C6.1 C7.1 C8.1 C9.1 C10.1 C11.1 C12.1 C13.2 C14.2 C15.2 C16.1 C17.1 C18.1 C19.1 C20.1 C21.1 C22.1 C23.1 C24.1 D2.1 J1.2 J2.5 J3.2 J5.2 J6.1 J7.2 J8.2 J9.2 J4.2 Q1.1 Q1.3 Q2.1 Q2.3 R1.1 R10.1 R12.2 R14.1 R16.1 S1.3 S1.4 U1.12 U1.18 U1.31 U1.47 U1.63 U2.1 U3.4 U4.2 U4.4 U4.6 U4.10 U4.15 U5.3 U6.2 U7.2 X1.2 X1.4
HSE-IN: C12.2 U1.5 X1.1
HSE-OUT: R2.2 U1.6
HSE-OUT-R: C11.2 R2.1 X1.3
I2C1-SCL: J8.1 R6.1 U1.58 U5.8
I2C1-SDA: J8.3 R7.1 U1.59 U5.7
I2C3-SCL: J7.1 R8.1 U1.41 U4.8
I2C3-SDA: J7.3 R9.1 U1.40 U4.9
INPUT: F1.1 J9.1
LED: D1.A U1.33
LED-K: R5.1 D1.K
MISO: J6.3 U1.22 U3.2
MOSI: J6.4 U1.23 U3.5
NetC14_1: C14.1 FB2.2 J2.1
NetC19_2: C19.2 D2.2 F1.2 U6.1
NetC22_2: C22.2 U7.4
NetD3_K: D3.K R12.1
NetJ10_1: J10.1 Q1.5 Q1.6 Q1.7 Q1.8
NetJ10_2: J10.2 J10.3
NetJ11_1: J11.1 Q2.5 Q2.6 Q2.7 Q2.8
NetJ11_2: J11.2 J11.3
NetQ1_2: Q1.2 Q1.4 R13.2 R14.2
NetQ2_2: Q2.2 Q2.4 R15.2 R16.2
NetR3_1: R3.1 R13.1
NetR4_2: R4.2 R15.1
NRST: C10.2 S1.1 S1.2 U1.7
SCK: J6.2 U1.21 U3.6
SS: J6.5 R11.1 U1.20 U3.1
SWCLK: J3.3 U1.49
SWDIO: J3.1 U1.46
SWO: J3.5 U1.55
UART4-RX: J5.1 U1.15
UART4-TX: J5.3 U1.14
USART2-RX: J4.1 U1.17
USART2-TX: J4.3 U1.16
USB_D_N: J2.2 U1.44
USB_D_P: J2.3 U1.45
VCAP1: C9.2 U1.30
VDDA: C7.2 C8.2 FB1.2 U1.13
pads on no net: J2.4 J2.S1 J2.S2 J2.S3 J2.S4 J2.S5 J2.S6 U1.2 U1.3 U1.4 U1.8 U1.9 U1.11 U1.24 U1.25 U1.26 U1.27 U1.28 U1.29 U1.35 U1.37 U1.38 U1.39 U1.42 U1.43 U1.50 U1.51 U1.52 U1.53 U1.54 U1.56 U1.57 U1.61 U1.62 U4.1 U4.5 U4.12 U4.13 U4.16 U5.6

## Text inside footprints (layer, text, board x,y; h text height)
D1: Top Overlay "+" at 220.647,39.505 h1
D3: Top Overlay "+" at 247.444,80.145 h1